# EAGLE board mrShark 01.a_nutzen (EAGLE 5.11)
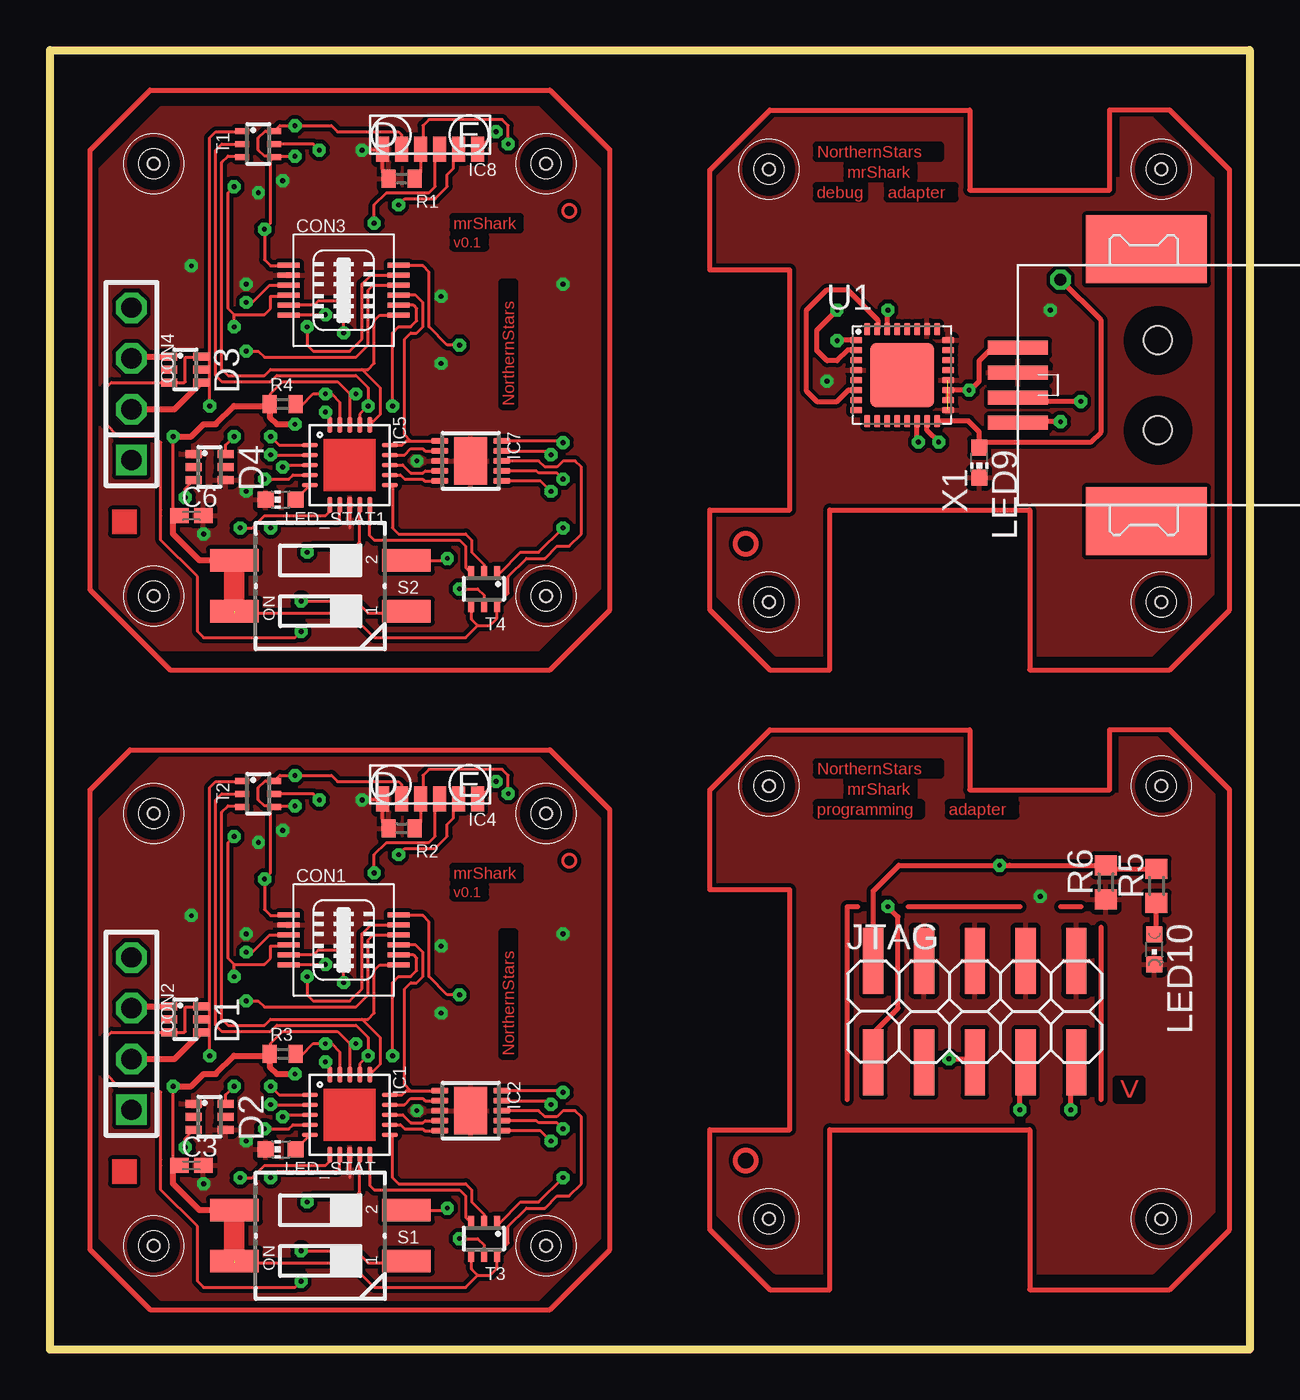
[diagram p0: board, top side]
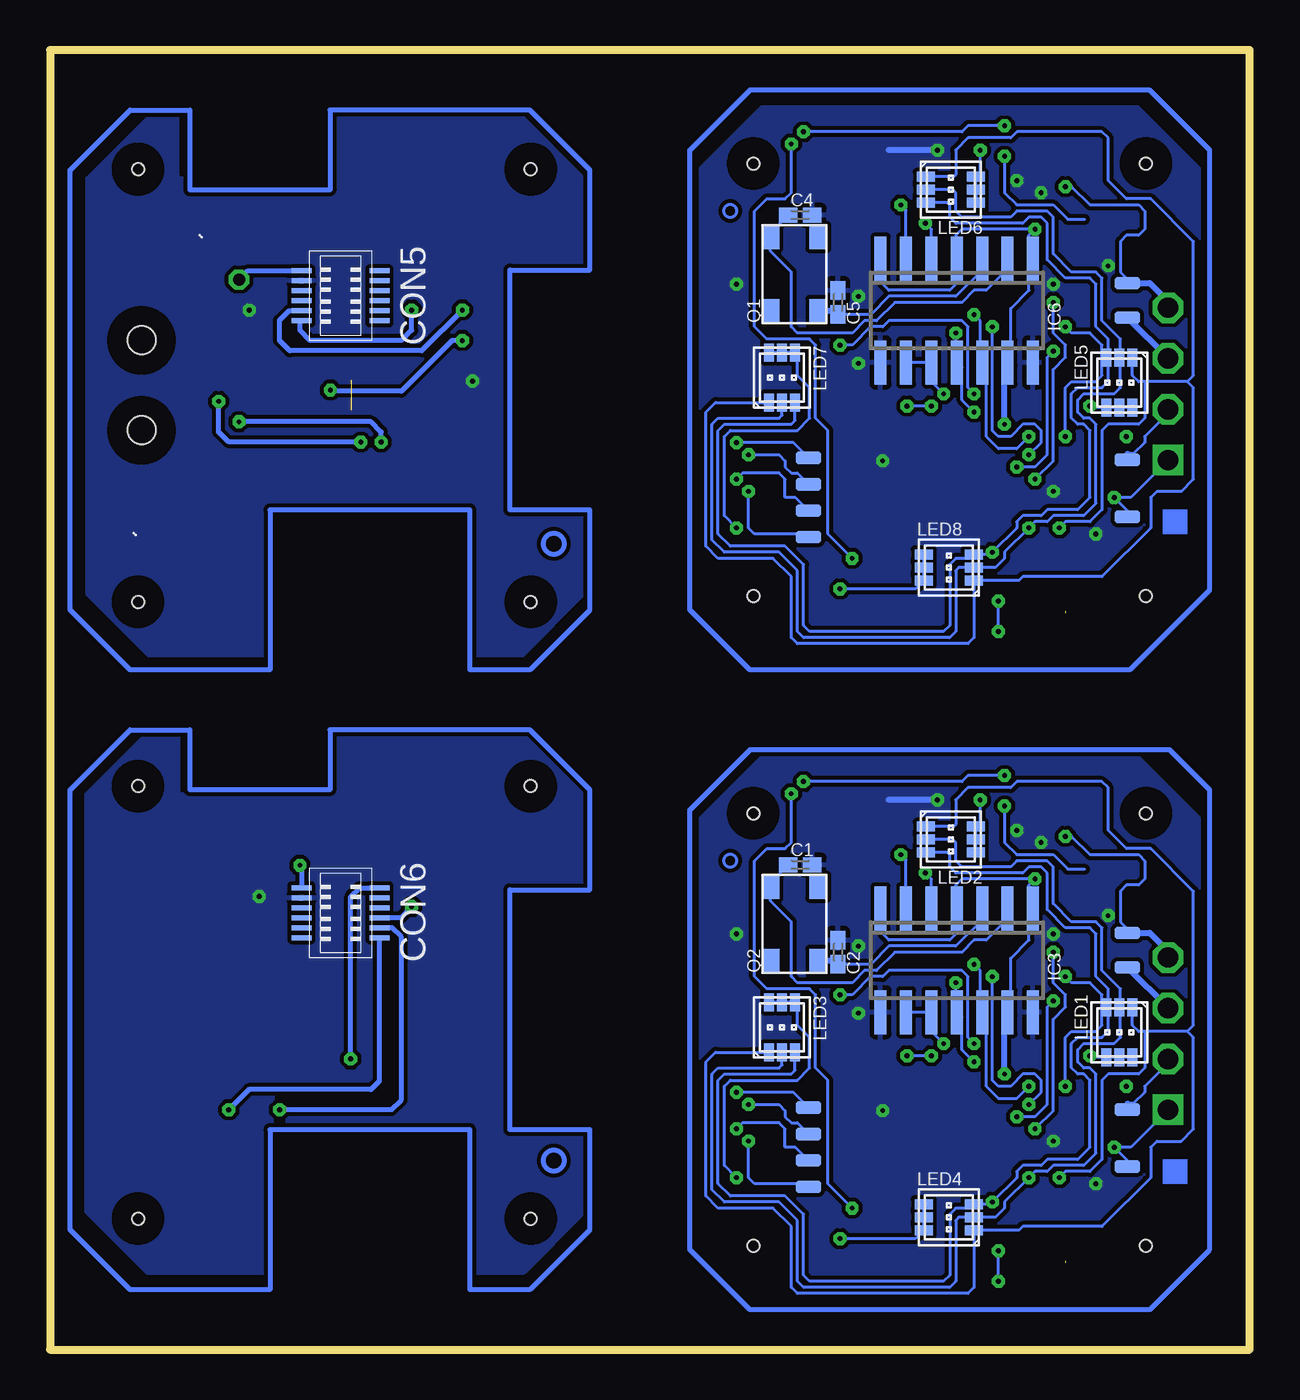
[diagram p1: board, bottom side, seen from below]

Size 60 x 65 mm. Coordinates in mm from the lower left corner, seen from the top.
Outline: 0,0 0,65 60,65 60,0 0,0
Copper layers (1*16): Top 0.035mm / dielectric 1.5mm / Bottom 0.035mm
Design rules "default": minimum track width 10mil, minimum drill 24mil, track to track 8mil, track to pad 8mil, pad to pad 8mil, via to via 8mil, smd to smd 8mil, copper to edge 40mil, drill to drill 8mil, minimum pad ring 10mil, minimum via ring 8mil, stop-mask expansion 4mil, vias tented up to drill 0mil, thermal gap 10mil

## Footprints (pad centres in the part's own frame; a part is rotated, then mirrored left to right if it is on the bottom)
SMD0,635-1,27 = smd 0.635 x 1.27: P$1 0,0
C0402K = smd 0.925 x 0.74: 1 -0.6,0; 2 0.6,0
DF23C-12DS = smd 0.25 x 1.1: 1 -1.25,-2.75; 2 -0.75,-2.75; 3 -0.25,-2.75; 4 0.25,-2.75; 5 0.75,-2.75; 6 1.25,-2.75; 7 1.25,2.75; 8 0.75,2.75; 9 0.25,2.75; 10 -0.25,2.75; 11 -0.75,2.75; 12 -1.25,2.75
1X04 = drill 1.016 square: 1 -3.81,0 | drill 1.016 octagon: 2 -1.27,0; 3 1.27,0; 4 3.81,0
DF23C-12-DP = smd 0.25 x 1: 1 -1.25,1.95; 2 -0.75,1.95; 3 -0.25,1.95; 4 0.25,1.95; 5 0.75,1.95; 6 1.25,1.95; 7 1.25,-1.95; 8 0.75,-1.95; 9 0.25,-1.95; 10 -0.25,-1.95; 11 -0.75,-1.95; 12 -1.25,-1.95
SOT363_PHILIPS = smd 0.4 x 0.8: 1 -0.65,-0.8; 2 0,-0.8; 3 0.65,-0.8; 4 0.65,0.8; 5 0,0.8; 6 -0.65,0.8
1,5 = hole 0.6: 0,0
MLF20 = smd 0.8 x 0.23: P$1 -2,1; P$2 -2,0.5; P$3 -2,0; P$4 -2,-0.5; P$5 -2,-1; P$11 2,-1; P$12 2,-0.5; P$13 2,0; P$14 2,0.5; P$15 2,1 | smd 0.23 x 0.8: P$6 -1,-2; P$7 -0.5,-2; P$8 0,-2; P$9 0.5,-2; P$10 1,-2; P$16 1,2; P$17 0.5,2; P$18 0,2; P$19 -0.5,2; P$20 -1,2
DFN10-3X3 = smd 0.3 x 0.85: 1 -1,-1.55; 2 -0.5,-1.55; 3 0,-1.55; 4 0.5,-1.55; 5 1,-1.55; 6 1,1.55; 7 0.5,1.55; 8 0,1.55; 9 -0.5,1.55; 10 -1,1.55 | smd 2.38 x 1.65: EXP 0,0
SO-14 = smd 0.6 x 2.2: 1 -3.81,-2.6; 2 -2.54,-2.6; 3 -1.27,-2.6; 4 0,-2.6; 5 1.27,-2.6; 6 2.54,-2.6; 7 3.81,-2.6; 8 3.81,2.6; 9 2.54,2.6; 10 1.27,2.6; 11 0,2.6; 12 -1.27,2.6; 13 -2.54,2.6; 14 -3.81,2.6
TFBS4711 = smd 0.635 x 1.27: 1 -2.38,0.72; 2 -1.43,0.72; 3 -0.48,0.72; 4 0.47,0.72; 5 1.42,0.72; 6 2.37,0.72
2X05SMD = smd 1.016 x 3.302: 1 -1.27,-3.81; 2 -1.27,1.27; 3 1.27,-3.81; 4 1.27,1.27; 5 3.81,-3.81; 6 3.81,1.27; 7 6.35,-3.81; 8 6.35,1.27; 9 8.89,-3.81; 10 8.89,1.27
PLCC6 = smd 0.9 x 0.5: 1 1.25,-0.65; 2 1.25,0; 3 1.25,0.65; 4 -1.25,0.65; 5 -1.25,0; 6 -1.25,-0.65
CHIP-LED0603 = smd 0.8 x 0.8: A 0,-0.75; C 0,0.75
CHIPLED_0603 = smd 0.8 x 0.8: A 0,-0.75; C 0,0.75
CFPX-104 = smd 1.2 x 0.9: P$1 -1.8,-1.2; P$2 1.9,1.2; P$3 -1.8,1.2; P$4 1.9,-1.2
R0402 = smd 0.7 x 0.9: 1 -0.65,0; 2 0.65,0
R0603 = smd 1 x 1.1: 1 -0.85,0; 2 0.85,0
CTS-219-02 = smd 1.13 x 2.44: 1 -1.27,-4.3; 2 1.27,-4.3; 3 1.27,4.3; 4 -1.27,4.3
SOT363_INFINEON = smd 0.3 x 0.7: 1 -0.65,-0.8; 2 0,-0.8; 3 0.65,-0.8; 4 0.65,0.8; 5 0,0.8; 6 -0.65,0.8
QFN32 = smd 0.6 x 0.3: 1 -2.3,1.75; 2 -2.3,1.25; 3 -2.3,0.75; 4 -2.3,0.25; 5 -2.3,-0.25; 6 -2.3,-0.75; 7 -2.3,-1.25; 8 -2.3,-1.75; 17 2.3,-1.75; 18 2.3,-1.25; 19 2.3,-0.75; 20 2.3,-0.25; 21 2.3,0.25; 22 2.3,0.75; 23 2.3,1.25; 24 2.3,1.75 | smd 0.3 x 0.6: 9 -1.75,-2.3; 10 -1.25,-2.3; 11 -0.75,-2.3; 12 -0.25,-2.3; 13 0.25,-2.3; 14 0.75,-2.3; 15 1.25,-2.3; 16 1.75,-2.3; 25 1.75,2.3; 26 1.25,2.3; 27 0.75,2.3; 28 0.25,2.3; 29 -0.25,2.3; 30 -0.75,2.3; 31 -1.25,2.3; 32 -1.75,2.3 | smd 3.2 x 3.2: EXP 0,0
USB-B-SMT = smd 6.04 x 3.4: 5 0.58,6.8; 6 0.58,-6.8 | smd 3 x 0.7: D+ 7,1.875; D- 7,0.625; GND 7,-0.625; VUSB 7,-1.875 | hole 1.4: 0,2.25; 0,-2.25

## Placement (x,y rotation side)
BAT1+  [SMD0,635-1,27]  6.11,19.11 90 bottom
BAT1+1  [SMD0,635-1,27]  6.11,51.61 90 bottom
BAT1-  [SMD0,635-1,27]  6.11,20.84 90 bottom
BAT1-1  [SMD0,635-1,27]  6.11,53.34 90 bottom
BAT2+  [SMD0,635-1,27]  6.11,12 90 bottom
BAT2+1  [SMD0,635-1,27]  6.11,44.5 90 bottom
BAT2-  [SMD0,635-1,27]  6.11,9.15 90 bottom
BAT2-1  [SMD0,635-1,27]  6.11,41.65 90 bottom
C1  18p  [C0402K]  22.46,24.24 0 bottom
C2  18p  [C0402K]  20.58,19.87 90 bottom
C3  100n  [C0402K]  7.07,9.21 0 top
C4  18p  [C0402K]  22.46,56.74 0 bottom
C5  18p  [C0402K]  20.58,52.37 90 bottom
C6  100n  [C0402K]  7.07,41.71 0 top
CON1  DF-23C-12DS-0.5V  [DF23C-12DS]  14.69,20.48 270 top
CON2  SQT-104-01-L-S  [1X04]  4.07,15.8 90 top
CON3  DF-23C-12DS-0.5V  [DF23C-12DS]  14.69,52.98 270 top
CON4  SQT-104-01-L-S  [1X04]  4.07,48.3 90 top
CON5  DF-23C-12DP-0.5V  [DF23C-12-DP]  45.47,52.7 270 bottom
CON6  DF-23C-12DP-0.5V  [DF23C-12-DP]  45.47,21.85 270 bottom
D1  BAS70-07S  [SOT363_PHILIPS]  6.77,16.52 270 top
D2  BAS70-07S  [SOT363_PHILIPS]  7.99,11.64 270 top
D3  BAS70-07S  [SOT363_PHILIPS]  6.77,49.02 270 top
D4  BAS70-07S  [SOT363_PHILIPS]  7.99,44.14 270 top
H1  MOUNT-HOLE1,5  [1,5]  5.18,5.18 0 top
H2  MOUNT-HOLE1,5  [1,5]  24.82,5.18 0 top
H3  MOUNT-HOLE1,5  [1,5]  24.82,26.82 0 top
H4  MOUNT-HOLE1,5  [1,5]  5.18,26.82 0 top
H5  MOUNT-HOLE1,5  [1,5]  5.18,37.68 0 top
H6  MOUNT-HOLE1,5  [1,5]  24.82,37.68 0 top
H7  MOUNT-HOLE1,5  [1,5]  24.82,59.32 0 top
H8  MOUNT-HOLE1,5  [1,5]  5.18,59.32 0 top
H9  MOUNT-HOLE1,5  [1,5]  35.96,37.4 0 top
H10  MOUNT-HOLE1,5  [1,5]  55.6,37.4 0 top
H11  MOUNT-HOLE1,5  [1,5]  55.6,59.04 0 top
H12  MOUNT-HOLE1,5  [1,5]  35.96,59.04 0 top
H13  MOUNT-HOLE1,5  [1,5]  35.96,6.54 0 top
H14  MOUNT-HOLE1,5  [1,5]  55.6,6.54 0 top
H15  MOUNT-HOLE1,5  [1,5]  55.6,28.18 0 top
H16  MOUNT-HOLE1,5  [1,5]  35.96,28.18 0 top
IC1  TINY4313MU  [MLF20]  15,11.75 0 top
IC2  A3901  [DFN10-3X3]  21.04,11.95 270 top
IC3  MCP2120-I/SL  [SO-14]  14.64,19.47 180 bottom
IC4  TFBS4711-TR1  [TFBS4711]  19.01,28.26 180 top
IC5  TINY4313MU  [MLF20]  15,44.25 0 top
IC6  MCP2120-I/SL  [SO-14]  14.64,51.97 180 bottom
IC7  A3901  [DFN10-3X3]  21.04,44.45 270 top
IC8  TFBS4711-TR1  [TFBS4711]  19.01,60.76 180 top
JTAG  [2X05SMD]  42.45,18.17 0 top
LED1  ASMT-YTD2-0BB02  [PLCC6]  6.51,15.86 90 bottom
LED2  ASMT-YTD2-0BB02  [PLCC6]  14.95,25.51 180 bottom
LED3  ASMT-YTD2-0BB02  [PLCC6]  23.38,16.11 270 bottom
LED4  ASMT-YTD2-0BB02  [PLCC6]  15.05,6.61 0 bottom
LED5  ASMT-YTD2-0BB02  [PLCC6]  6.51,48.36 90 bottom
LED6  ASMT-YTD2-0BB02  [PLCC6]  14.95,58.01 180 bottom
LED7  ASMT-YTD2-0BB02  [PLCC6]  23.38,48.61 270 bottom
LED8  ASMT-YTD2-0BB02  [PLCC6]  15.05,39.11 0 bottom
LED9  rot  [CHIP-LED0603]  46.48,44.37 180 top
LED10  rot  [CHIPLED_0603]  55.25,20.02 180 top
LED_STAT  green  [CHIP-LED0603]  11.54,10.02 90 top
LED_STAT1  green  [CHIP-LED0603]  11.54,42.52 90 top
MOTOR_L+  [SMD0,635-1,27]  22.06,12.1 90 bottom
MOTOR_L+1  [SMD0,635-1,27]  22.06,44.6 90 bottom
MOTOR_L-  [SMD0,635-1,27]  22.06,10.78 90 bottom
MOTOR_L-1  [SMD0,635-1,27]  22.06,43.28 90 bottom
MOTOR_R+  [SMD0,635-1,27]  22.06,9.46 90 bottom
MOTOR_R+1  [SMD0,635-1,27]  22.06,41.96 90 bottom
MOTOR_R-  [SMD0,635-1,27]  22.06,8.14 90 bottom
MOTOR_R-1  [SMD0,635-1,27]  22.06,40.64 90 bottom
Q1  14.7456MHz  [CFPX-104]  22.77,53.75 90 bottom
Q2  14.7456MHz  [CFPX-104]  22.77,21.25 90 bottom
R1  1k  [R0402]  17.59,58.57 0 top
R2  1k  [R0402]  17.59,26.07 0 top
R3  1k  [R0402]  11.64,14.79 0 top
R4  1k  [R0402]  11.64,47.29 0 top
R5  100R  [R0603]  55.35,23.19 90 top
R6  1k  [R0603]  52.81,23.37 90 top
S1  MCEMR-02-T  [CTS-219-02]  13.52,5.7 90 top
S2  MCEMR-02-T  [CTS-219-02]  13.52,38.2 90 top
T1  UMX3NTR  [SOT363_INFINEON]  10.42,60.3 270 top
T2  UMX3NTR  [SOT363_INFINEON]  10.42,27.8 270 top
T3  UMX3NTR  [SOT363_INFINEON]  21.7,5.55 180 top
T4  UMX3NTR  [SOT363_INFINEON]  21.7,38.05 180 top
U1  [QFN32]  42.62,48.74 0 top
X1  [USB-B-SMT]  55.42,48.23 180 top

## Library data of the parts
BAT1+ BAT1+1 BAT1- BAT1-1 BAT2+ BAT2+1 BAT2- BAT2-1 MOTOR_L+ MOTOR_L+1 MOTOR_L- MOTOR_L-1 MOTOR_R+ MOTOR_R+1 MOTOR_R- MOTOR_R-1 = wirepad
C1-C6 R1-R6 = rcl
CON1 CON3 CON5 CON6 = con-hirose
CON2 CON4 = pinhead-2mm
D1-D4 = diode
H1-H16 = holes
IC1 IC5 = avr-6
IC2 IC7 = allegro
IC3 IC6 = microchip
IC4 IC8 = vishay
JTAG = pinhead-2
LED1-LED10 LED_STAT LED_STAT1 = led
Q1 Q2 = crystal
S1 S2 = switch-dil
T1-T4 = transistor-small-signal
U1 = ftdichip
X1 = con-usb-3

## Nets
+3V3: CON5.12 LED9.A U1.16
BAT1+: BAT1+.P$1 CON2.3 D1.1
BAT1+1: BAT1+1.P$1 CON4.3 D3.1
BAT1-: BAT1-.P$1 CON2.4 D2.6
BAT1-1: BAT1-1.P$1 CON4.4 D4.6
BAT2+: BAT2+.P$1 CON2.2 D1.4
BAT2+1: BAT2+1.P$1 CON4.2 D3.4
BAT2-: BAT2-.P$1 CON2.1 D2.3
BAT2-1: BAT2-1.P$1 CON4.1 D4.3
GND2: C1.2 C2.2 C3.2 CON1.2 D2.1 D2.4 IC1.P$8 IC2.3 IC2.EXP IC3.8 IC3.14 IC4.6 LED_STAT.C R2.1
GND3: C4.2 C5.2 C6.2 CON3.2 D4.1 D4.4 IC5.P$8 IC6.8 IC6.14 IC7.3 IC7.EXP IC8.6 LED_STAT1.C R1.1
GND5: CON6.11 JTAG.4 JTAG.6 JTAG.8 JTAG.10 LED10.C R6.1
GND6: CON5.11 LED9.C U1.4 U1.17 U1.20 U1.24 U1.26 X1.GND
INT0: CON1.3 IC1.P$4
INT1: CON1.4
INT2: CON3.3 IC5.P$4
INT3: CON3.4
INT4: CON6.10
INT5: CON6.9
LED1: IC5.P$11 T4.2
LED1+: LED1.4 LED1.5 LED1.6 T2.1
LED1+1: LED5.4 LED5.5 LED5.6 T1.1
LED2: IC5.P$10 T4.3
LED2+: LED2.4 LED2.5 LED2.6 T2.5
LED2+1: LED6.4 LED6.5 LED6.6 T1.5
LED3: IC1.P$11 T3.2
LED3+: LED3.4 LED3.5 LED3.6 T3.1
LED3+1: LED7.4 LED7.5 LED7.6 T4.1
LED4: IC1.P$10 T3.3
LED4+: LED4.4 LED4.5 LED4.6 T3.5
LED4+1: LED8.4 LED8.5 LED8.6 T4.5
LED_B: IC1.P$6 LED1.1 LED2.1 LED3.1 LED4.1
LED_B1: IC5.P$6 LED5.1 LED6.1 LED7.1 LED8.1
LED_G: IC1.P$7 LED1.2 LED2.2 LED3.2 LED4.2
LED_G1: IC5.P$7 LED5.2 LED6.2 LED7.2 LED8.2
LED_R: IC1.P$9 LED1.3 LED2.3 LED3.3 LED4.3
LED_R1: IC5.P$9 LED5.3 LED6.3 LED7.3 LED8.3
LED_STAT: IC1.P$5 LED_STAT.A
LED_STAT1: IC5.P$5 LED_STAT1.A
MISO: CON6.6 JTAG.9
MISO/LED1: CON3.7 IC5.P$16 T1.3
MISO/LED2: CON1.7 IC1.P$16 T2.3
MOSI: CON6.4 JTAG.1
MOSI/MOTOR_L_DIR: CON1.9 IC1.P$15 IC2.1
MOSI/MOTOR_L_DIR1: CON3.9 IC5.P$15 IC7.1
MOTOR_L+: IC2.10 MOTOR_L+.P$1
MOTOR_L+1: IC7.10 MOTOR_L+1.P$1
MOTOR_L-: IC2.9 MOTOR_L-.P$1
MOTOR_L-1: IC7.9 MOTOR_L-1.P$1
MOTOR_L_PWM: IC1.P$14 IC2.2
MOTOR_L_PWM1: IC5.P$14 IC7.2
MOTOR_R+: IC2.7 MOTOR_R+.P$1
MOTOR_R+1: IC7.7 MOTOR_R+1.P$1
MOTOR_R-: IC2.6 MOTOR_R-.P$1
MOTOR_R-1: IC7.6 MOTOR_R-1.P$1
MOTOR_R_DIR: IC1.P$12 IC2.5
MOTOR_R_DIR1: IC5.P$12 IC7.5
MOTOR_R_PWM: IC1.P$13 IC2.4
MOTOR_R_PWM1: IC5.P$13 IC7.4
N$1: C2.1 IC3.3 Q2.P$1
N$2: C1.1 IC3.2 Q2.P$2
N$3: C5.1 IC6.3 Q1.P$1
N$4: C4.1 IC6.2 Q1.P$2
N$5: U1.6 U1.31
N$6: U1.15 X1.D-
N$7: U1.14 X1.D+
N$8: LED10.A R5.1
PA0: CON1.10 IC1.P$3
PA1: CON1.11 IC1.P$2
PA2: CON3.10 IC5.P$3
PA3: CON3.11 IC5.P$2
PA4: CON6.3
PA5: CON6.2
RESET: CON1.12 IC1.P$19 R3.2
RESET1: CON3.12 IC5.P$19 R4.2
RESET2: CON6.1 JTAG.5
RXD: CON1.5 IC1.P$20 IC3.11
RXD1: CON3.5 IC5.P$20 IC6.11
RXD2: CON5.8 U1.2
RXD3: CON6.8
RXIR: IC3.5 IC4.3
RXIR1: IC6.5 IC8.3
SCK: CON6.5 JTAG.7
SCK/LED1: CON1.8 IC1.P$17 T2.2
SCK/LED2: CON3.8 IC5.P$17 T1.2
T_IR: IC4.4 R2.2 S1.2
T_IR1: IC8.4 R1.2 S2.2
TXD: CON1.6 IC1.P$1 IC3.12
TXD1: CON3.6 IC5.P$1 IC6.12
TXD2: CON5.7 U1.30
TXD3: CON6.7
TXIR: IC3.6 IC4.2
TXIR1: IC6.6 IC8.2
VBAT: D1.3 D1.6 S1.1
VBAT1: D3.3 D3.6 S2.1
VCC: C3.1 CON1.1 IC1.P$18 IC2.8 IC3.1 IC3.4 IC3.7 IC3.9 IC3.10 IC3.13 IC4.1 IC4.5 R3.1 S1.3 S1.4 T2.4 T2.6 T3.4 T3.6
VCC1: C6.1 CON3.1 IC5.P$18 IC6.1 IC6.4 IC6.7 IC6.9 IC6.10 IC6.13 IC7.8 IC8.1 IC8.5 R4.1 S2.3 S2.4 T1.4 T1.6 T4.4 T4.6
VCC2: U1.1 U1.18 U1.19 X1.VUSB
VCC3: CON6.12 JTAG.2 R5.2 R6.2

## Tracks (layer width: path | path; a pad name or v marks a point on that pad's centre or on a via)
+3V3  (via drill 0.6 pad 0.41)
  Top 0.254: U1.16 45.94,46.44 46.48,45.9 46.48,45.39 | 46.48,45.39 52.07,45.39 52.58,45.9 52.58,51.48 v50.55,53.52 | LED9.A 46.48,45.39
  Bottom 0.254: CON5.12 50.11,53.95 v50.55,53.52
BAT1+
  Top 0.305: D1.1 4.17,17.17 CON2.3
  Bottom 0.305: CON2.3 BAT1+.P$1
BAT1+1
  Top 0.305: D3.1 4.17,49.67 CON4.3
  Bottom 0.305: CON4.3 BAT1+1.P$1
BAT1-  (via drill 0.24, 0.24 pad 0.41)
  Top 0.152: v9.21,25.66 8.9,25.36 8.9,19.57 9.21,19.26 | 9.21,19.26 10.73,19.26 11.03,19.57 11.03,20.18 11.89,20.18 | D2.6 8.79,12.75 v9.21,13.17 | v9.21,18.65 9.21,19.26
  Bottom 0.152: BAT1-.P$1 6.11,21.04 6.46,21.4 6.46,22.92 6.16,23.23 5.55,23.23 5.24,23.53 5.24,24.45 5.55,24.75 7.99,24.75 8.9,25.66 v9.21,25.66 | v9.21,13.17 9.21,15.61 8.9,15.91 7.68,15.91 7.38,16.22 7.38,17.74 7.99,18.35 8.9,18.35 v9.21,18.65
  Bottom 0.305: CON2.4 4.07,19.92 4.99,20.84 BAT1-.P$1
BAT1-1  (via drill 0.24, 0.24 pad 0.41)
  Top 0.152: v9.21,58.16 8.9,57.86 8.9,52.07 9.21,51.76 | 9.21,51.76 10.73,51.76 11.03,52.07 11.03,52.68 11.89,52.68 | D4.6 8.79,45.25 v9.21,45.67 | v9.21,51.15 9.21,51.76
  Bottom 0.152: BAT1-1.P$1 6.11,53.54 6.46,53.9 6.46,55.42 6.16,55.73 5.55,55.73 5.24,56.03 5.24,56.95 5.55,57.25 7.99,57.25 8.9,58.16 v9.21,58.16 | v9.21,45.67 9.21,48.11 8.9,48.41 7.68,48.41 7.38,48.72 7.38,50.24 7.99,50.85 8.9,50.85 v9.21,51.15
  Bottom 0.305: CON4.4 4.07,52.42 4.99,53.34 BAT1-1.P$1
BAT2+
  Top 0.305: CON2.2 6.23,14.53 D1.4
  Bottom 0.152: 6.11,12.3 5.8,12.3 5.24,12.86 5.24,13.17 4.07,14.34 CON2.2
  Bottom 0.305: 6.11,12.3 BAT2+.P$1
BAT2+1
  Top 0.305: CON4.2 6.23,47.03 D3.4
  Bottom 0.152: 6.11,44.8 5.8,44.8 5.24,45.36 5.24,45.67 4.07,46.84 CON4.2
  Bottom 0.305: 6.11,44.8 BAT2+1.P$1
BAT2-  (via drill 0.24 pad 0.41)
  Top 0.152: D2.3 6.77,10.57 v6.77,10.12
  Bottom 0.152: BAT2-.P$1 6.11,9.46 v6.77,10.12 5.94,10.12 CON2.1
BAT2-1  (via drill 0.24 pad 0.41)
  Top 0.152: D4.3 6.77,43.08 v6.77,42.62
  Bottom 0.152: BAT2-1.P$1 6.11,41.96 v6.77,42.62 5.94,42.62 CON4.1
GND2  (via drill 0.24, 0.24 pad 0.41)
  Top 0.152: R2.1 16.64,26.37 IC4.6 16.6,27.49 v15.61,27.49 | IC1.P$8 15,8.6
  Bottom 0.305: v15.61,27.49 18.05,27.49
  other vias: 18.35,11.95 7.68,8.29 9.82,10.42 19.57,16.83 19.57,20.18 11.64,25.97 10.42,25.36 9.82,20.79 7.07,21.7 25.66,20.79
  pour Top: 2.5,5.55 2.5,26.58 5.55,29.63 24.45,29.63 27.49,26.58 27.49,5.55 24.45,2.5 5.55,2.5
  pour Bottom: 2.5,5.55 2.5,26.58 5.55,29.63 24.45,29.63 27.49,26.58 27.49,5.55 24.45,2.5 5.55,2.5
GND3  (via drill 0.24, 0.24 pad 0.41)
  Top 0.152: R1.1 16.64,58.87 IC8.6 16.6,59.99 v15.61,59.99 | IC5.P$8 15,41.1
  Bottom 0.305: v15.61,59.99 18.05,59.99
  other vias: 18.35,44.45 7.68,40.79 9.82,42.92 19.57,49.33 19.57,52.68 11.64,58.47 10.42,57.86 9.82,53.29 7.07,54.2 25.66,53.29
  pour Top: 2.5,38.05 2.5,59.08 5.55,62.13 24.45,62.13 27.49,59.08 27.49,38.05 24.45,35 5.55,35
  pour Bottom: 2.5,38.05 2.5,59.08 5.55,62.13 24.45,62.13 27.49,59.08 27.49,38.05 24.45,35 5.55,35
GND5  (via drill 0.24 pad 0.41)
  other vias: 49.53,22.66
  pour Bottom (rank 2): 37.34,10.98 37.34,22.66 33.28,22.66 33.28,27.74 36.32,30.79 46.48,30.79 46.48,27.74 53.6,27.74 53.6,30.79 55.12,30.79 58.17,27.74 58.17,6.91 55.12,3.86 49.02,3.86 49.02,10.47 49.02,10.98 39.37,10.98 39.37,3.86 36.32,3.86 33.28,6.91 33.28,10.98
  pour Top (rank 2): 37.34,10.98 37.34,22.66 33.28,22.66 33.28,27.74 36.32,30.79 46.48,30.79 46.48,27.74 53.6,27.74 53.6,30.79 55.12,30.79 58.17,27.74 58.17,6.91 55.12,3.86 49.02,3.86 49.02,10.98 39.37,10.98 39.37,3.86 36.32,3.86 33.28,6.91 33.28,10.98
GND6  (via drill 0.24 pad 0.41)  (1 unrouted)
  other vias: 50.04,51.99 38.86,48.44
  pour Bottom: 37.34,41.83 37.34,53.52 33.28,53.52 33.28,58.6 36.32,61.64 46.48,61.64 46.48,58.6 53.6,58.6 53.6,61.64 55.12,61.64 58.17,58.6 58.17,37.77 55.12,34.72 49.02,34.72 49.02,41.83 39.37,41.83 39.37,34.72 36.32,34.72 33.28,37.77 33.28,41.83
  pour Top: 37.34,41.83 37.34,53.52 33.28,53.52 33.28,58.6 36.32,61.64 46.48,61.64 46.48,58.6 53.6,58.6 53.6,61.64 55.12,61.64 58.17,58.6 58.17,37.77 55.12,34.72 49.02,34.72 49.02,41.32 49.02,41.83 39.37,41.83 39.37,34.72 36.32,34.72 33.28,37.77 33.28,41.83
INT0  (via drill 0.24, 0.24 pad 0.41)
  Top 0.152: IC1.P$4 12.16,11.25 11.95,11.03 v10.73,11.03 | CON1.3 10.98,20.73 10.12,19.87 v9.81,19.87
  Bottom 0.152: v10.73,11.03 9.81,11.95 9.81,16.52 9.21,17.13 9.21,17.74 9.81,18.35 v9.81,19.87
INT2  (via drill 0.24, 0.24 pad 0.41)
  Top 0.152: IC5.P$4 12.16,43.75 11.95,43.53 v10.73,43.53 | CON3.3 10.98,53.23 10.12,52.37 v9.81,52.37
  Bottom 0.152: v10.73,43.53 9.81,44.45 9.81,49.02 9.21,49.63 9.21,50.24 9.81,50.85 v9.81,52.37
LED1
  Top 0.152: T4.2 21.7,39.27 21.09,39.88 21.09,40.49 20.79,40.79 17.43,40.79 17.13,41.1 17.13,43.11 IC5.P$11
LED1+  (via drill 0.24 pad 0.41)
  Top 0.152: T2.1 9.58,28.41 8.29,28.41 7.99,28.1 v7.99,14.69
  Bottom 0.152: LED1.6 LED1.5 LED1.4 7.91,14.61 v7.99,14.69
LED1+1  (via drill 0.24 pad 0.41)
  Top 0.152: T1.1 9.58,60.91 8.29,60.91 7.99,60.6 v7.99,47.19
  Bottom 0.152: LED5.6 LED5.5 LED5.4 7.91,47.11 v7.99,47.19
LED2
  Top 0.152: IC5.P$10 16,40.71 16.22,40.49 20.48,40.49 20.79,40.18 20.79,39.11 T4.3
LED2+  (via drill 0.24 pad 0.41)
  Top 0.152: T2.5 13.17,27.8 v13.47,27.49
  Bottom 0.152: LED2.4 LED2.5 LED2.6 13.47,26.39 v13.47,27.49
LED2+1  (via drill 0.24 pad 0.41)
  Top 0.152: T1.5 13.17,60.3 v13.47,59.99
  Bottom 0.152: LED6.4 LED6.5 LED6.6 13.47,58.89 v13.47,59.99
LED3
  Top 0.152: T3.2 21.7,6.77 21.09,7.38 21.09,7.99 20.79,8.29 17.43,8.29 17.13,8.6 17.13,10.61 IC1.P$11
LED3+  (via drill 0.24 pad 0.41)
  Top 0.152: T3.1 22.5,6.35 23.53,7.38 24.45,7.38 v25.66,8.6
  Bottom 0.152: LED3.6 LED3.5 LED3.4 22.62,17.25 22.62,16.22 22.01,15.61 22.01,14.08 22.62,13.47 25.97,13.47 26.27,13.17 26.27,9.21 v25.66,8.6
LED3+1  (via drill 0.24 pad 0.41)
  Top 0.152: T4.1 22.5,38.85 23.53,39.88 24.45,39.88 v25.66,41.1
  Bottom 0.152: LED7.6 LED7.5 LED7.4 22.62,49.75 22.62,48.72 22.01,48.11 22.01,46.58 22.62,45.97 25.97,45.97 26.27,45.67 26.27,41.71 v25.66,41.1
LED4
  Top 0.152: IC1.P$10 16,8.21 16.22,7.99 20.48,7.99 20.79,7.68 20.79,6.61 T3.3
LED4+  (via drill 0.24 pad 0.41)
  Top 0.152: T3.5 21.7,5.24 21.4,5.55 v20.48,5.55
  Bottom 0.152: LED4.4 LED4.5 LED4.6 16.71,5.55 v20.48,5.55
LED4+1  (via drill 0.24 pad 0.41)
  Top 0.152: T4.5 21.7,37.74 21.4,38.05 v20.48,38.05
  Bottom 0.152: LED8.4 LED8.5 LED8.6 16.71,38.05 v20.48,38.05
LED_B  (via drill 0.24 pad 0.41)
  Top 0.152: IC1.P$6 14,9.43 13.78,9.21 10.73,9.21 10.12,8.6 v9.51,8.6
  Bottom 0.152: LED2.1 14.8,26.16 14.69,26.27 14.69,27.49 14.08,28.1 11.95,28.1 11.64,28.41 7.38,28.41 7.07,28.1 7.07,25.97 6.16,25.05 4.94,25.05 2.81,22.92 2.81,16.22 3.11,15.91 | LED1.1 5.86,16.22 5.55,15.91 5.24,15.91 | 3.11,15.91 5.24,15.91 | 3.11,15.91 2.81,15.61 2.81,11.03 3.41,10.43 4.63,10.43 4.94,10.12 4.94,8.6 7.38,6.16 11.34,6.16 11.53,5.96 LED4.1 13.78,5.95 13.78,3.11 14.08,2.81 22.62,2.81 22.92,3.11 22.92,6.16 23.84,7.07 26.58,7.07 27.19,7.68 27.19,14.39 26.71,14.86 LED3.1 | 5.24,15.91 5.24,14.08 5.55,13.78 7.07,13.78 7.38,13.47 7.38,9.51 7.99,8.9 9.21,8.9 v9.51,8.6
LED_B1  (via drill 0.24 pad 0.41)
  Top 0.152: IC5.P$6 14,41.92 13.78,41.71 10.73,41.71 10.12,41.1 v9.51,41.1
  Bottom 0.152: LED6.1 14.8,58.66 14.69,58.77 14.69,59.99 14.08,60.6 11.95,60.6 11.64,60.91 7.38,60.91 7.07,60.6 7.07,58.47 6.16,57.55 4.94,57.55 2.81,55.42 2.81,48.72 3.11,48.41 | LED5.1 5.86,48.72 5.55,48.41 5.24,48.41 | 3.11,48.41 5.24,48.41 | 3.11,48.41 2.81,48.11 2.81,43.53 3.41,42.92 4.63,42.92 4.94,42.62 4.94,41.1 7.38,38.66 11.34,38.66 11.53,38.47 LED8.1 13.78,38.45 13.78,35.61 14.08,35.3 22.62,35.3 22.92,35.61 22.92,38.66 23.84,39.57 26.58,39.57 27.19,40.18 27.19,46.89 26.71,47.36 LED7.1 | 5.24,48.41 5.24,46.58 5.55,46.28 7.07,46.28 7.38,45.97 7.38,42.01 7.99,41.4 9.21,41.4 v9.51,41.1
LED_G  (via drill 0.24 pad 0.41)
  Top 0.152: IC1.P$7 14.5,9.01 14.39,8.9 11.34,8.9 v11.03,8.6
  Bottom 0.152: LED2.2 14.84,25.51 14.69,25.36 14.69,24.45 14.39,24.14 11.95,24.14 11.64,24.45 10.12,24.45 9.81,24.14 9.81,22.31 8.9,21.4 7.68,21.4 7.38,21.09 7.38,18.96 6.46,18.05 6.46,17.15 LED1.2 6.46,17.07 6.46,15.61 6.77,15.3 8.29,15.3 8.6,15 8.6,14.39 8.29,14.08 7.99,14.08 7.68,13.78 7.68,9.81 8.29,9.21 9.81,9.21 10.12,8.9 10.73,8.9 v11.03,8.6 12.25,7.38 12.25,7.07 12.71,6.62 LED4.2 14.54,6.62 14.69,6.46 14.69,3.41 15,3.11 22.31,3.11 22.62,3.41 22.62,6.46 23.53,7.38 26.27,7.38 26.88,7.99 26.88,13.78 26.58,14.08 23.53,14.08 23.38,14.23 LED3.2
LED_G1  (via drill 0.24 pad 0.41)
  Top 0.152: IC5.P$7 14.5,41.51 14.39,41.4 11.34,41.4 v11.03,41.1
  Bottom 0.152: LED6.2 14.84,58.01 14.69,57.86 14.69,56.95 14.39,56.64 11.95,56.64 11.64,56.95 10.12,56.95 9.81,56.64 9.81,54.81 8.9,53.9 7.68,53.9 7.38,53.59 7.38,51.46 6.46,50.55 6.46,49.65 LED5.2 6.46,49.57 6.46,48.11 6.77,47.8 8.29,47.8 8.6,47.5 8.6,46.89 8.29,46.58 7.99,46.58 7.68,46.28 7.68,42.31 8.29,41.71 9.81,41.71 10.12,41.4 10.73,41.4 v11.03,41.1 12.25,39.88 12.25,39.57 12.71,39.12 LED8.2 14.54,39.12 14.69,38.96 14.69,35.91 15,35.61 22.31,35.61 22.62,35.91 22.62,38.96 23.53,39.88 26.27,39.88 26.88,40.49 26.88,46.28 26.58,46.58 23.53,46.58 23.38,46.73 LED7.2
LED_R  (via drill 0.24 pad 0.41)
  Top 0.152: IC1.P$9 15.5,7.88 15.3,7.68 13.17,7.68 v12.86,7.38
  Bottom 0.152: LED2.3 15.11,24.86 15,24.75 15,24.14 14.69,23.84 11.34,23.84 11.03,24.14 10.43,24.14 10.12,23.84 10.12,22.01 9.21,21.09 7.99,21.09 7.68,20.79 7.68,18.65 7.07,18.05 7.07,17.19 LED1.3 7.07,17.03 7.07,15.91 7.38,15.61 8.6,15.61 8.9,15.3 8.9,14.08 8.6,13.78 8.29,13.78 7.99,13.47 7.99,10.12 8.6,9.51 10.12,9.51 10.43,9.21 11.34,9.21 11.64,8.9 11.64,8.6 v12.86,7.38 12.97,7.26 LED4.3 13.99,7.07 14.69,7.07 15,6.77 15,3.72 15.3,3.41 22.01,3.41 22.31,3.72 22.31,6.77 23.23,7.68 25.97,7.68 26.58,8.29 26.58,13.47 26.27,13.78 22.92,13.78 22.73,13.97 LED3.3
LED_R1  (via drill 0.24 pad 0.41)
  Top 0.152: IC5.P$9 15.5,40.38 15.3,40.18 13.17,40.18 v12.86,39.88
  Bottom 0.152: LED6.3 15.11,57.36 15,57.25 15,56.64 14.69,56.34 11.34,56.34 11.03,56.64 10.43,56.64 10.12,56.34 10.12,54.51 9.21,53.59 7.99,53.59 7.68,53.29 7.68,51.15 7.07,50.55 7.07,49.69 LED5.3 7.07,49.53 7.07,48.41 7.38,48.11 8.6,48.11 8.9,47.8 8.9,46.58 8.6,46.28 8.29,46.28 7.99,45.97 7.99,42.62 8.6,42.01 10.12,42.01 10.43,41.71 11.34,41.71 11.64,41.4 11.64,41.1 v12.86,39.88 12.97,39.77 LED8.3 13.99,39.57 14.69,39.57 15,39.27 15,36.22 15.3,35.91 22.01,35.91 22.31,36.22 22.31,39.27 23.23,40.18 25.97,40.18 26.58,40.79 26.58,45.97 26.27,46.28 22.92,46.28 22.73,46.47 LED7.3
LED_STAT
  Top 0.152: IC1.P$5 13,10.72 LED_STAT.A
LED_STAT1
  Top 0.152: IC5.P$5 13,43.22 LED_STAT1.A
MISO  (via drill 0.24 pad 0.41)
  Top 0.254: v51.06,11.99 51.06,14.08 JTAG.9
  Bottom 0.254: CON6.6 43.52,13.43 43.94,13.01 50.04,13.01 v51.06,11.99
MISO/LED1
  Top 0.152: 16,46.36 IC5.P$16 16.52,46.77 16.52,48.11 15.61,49.02 | T1.3 9.58,59.69 8.9,59.69 8.6,59.38 8.6,49.02 8.9,48.72 10.73,48.72 11.03,49.02 15.61,49.02 | CON3.7 16.49,51.73 16.22,51.46 16.22,49.33 15.91,49.02 15.61,49.02
MISO/LED2
  Top 0.152: 16,13.86 IC1.P$16 16.52,14.27 16.52,15.61 15.61,16.52 | T2.3 9.58,27.19 8.9,27.19 8.6,26.88 8.6,16.52 8.9,16.22 10.73,16.22 11.03,16.52 15.61,16.52 | CON1.7 16.49,19.23 16.22,18.96 16.22,16.83 15.91,16.52 15.61,16.52
MOSI  (via drill 0.24 pad 0.41)
  Top 0.254: JTAG.1 41.18,15.83 42.42,17.07 42.42,21.64 v41.91,22.15
  Bottom 0.254: CON6.4 42.47,21.6 v41.91,22.15
MOSI/MOTOR_L_DIR
  Top 0.152: IC1.P$15 17.62,12.75 17.83,12.95 18.05,12.95 | 18.05,12.95 IC2.1 | CON1.9 18.3,20.23 18.65,19.87 18.65,18.65 18.35,18.35 18.05,18.35 17.74,18.05 17.74,13.25 18.05,12.95
MOSI/MOTOR_L_DIR1
  Top 0.152: IC5.P$15 17.62,45.25 17.83,45.45 18.05,45.45 | 18.05,45.45 IC7.1 | CON3.9 18.3,52.73 18.65,52.37 18.65,51.15 18.35,50.85 18.05,50.85 17.74,50.55 17.74,45.75 18.05,45.45
MOTOR_L+  (via drill 0.24 pad 0.41)
  Top 0.152: IC2.10 25.58,12.95 v25.66,12.86
  Bottom 0.152: v25.66,12.86 22.82,12.86 MOTOR_L+.P$1
MOTOR_L+1  (via drill 0.24 pad 0.41)
  Top 0.152: IC7.10 25.58,45.45 v25.66,45.36
  Bottom 0.152: v25.66,45.36 22.82,45.36 MOTOR_L+1.P$1
MOTOR_L-  (via drill 0.24 pad 0.41)
  Top 0.152: IC2.9 24.86,12.45 v25.05,12.25
  Bottom 0.152: v25.05,12.25 23.53,12.25 23.23,11.95 23.23,11.64 22.92,11.34 22.62,11.34 MOTOR_L-.P$1
MOTOR_L-1  (via drill 0.24 pad 0.41)
  Top 0.152: IC7.9 24.86,44.95 v25.05,44.75
  Bottom 0.152: v25.05,44.75 23.53,44.75 23.23,44.45 23.23,44.14 22.92,43.84 22.62,43.84 MOTOR_L-1.P$1
MOTOR_L_PWM
  Top 0.152: IC1.P$14 17.73,12.25 18.05,12.56 18.65,12.56 18.76,12.45 IC2.2
MOTOR_L_PWM1
  Top 0.152: IC5.P$14 17.73,44.75 18.05,45.06 18.65,45.06 18.76,44.95 IC7.2
MOTOR_R+  (via drill 0.24 pad 0.41)
  Top 0.152: IC2.7 24.34,11.45 24.45,11.34 25.36,11.34 v25.66,11.03
  Bottom 0.152: v25.66,11.03 25.36,11.34 23.53,11.34 23.23,11.03 23.23,10.12 22.72,10.12 MOTOR_R+.P$1
MOTOR_R+1  (via drill 0.24 pad 0.41)
  Top 0.152: IC7.7 24.34,43.95 24.45,43.84 25.36,43.84 v25.66,43.53
  Bottom 0.152: v25.66,43.53 25.36,43.84 23.53,43.84 23.23,43.53 23.23,42.62 22.72,42.62 MOTOR_R+1.P$1
MOTOR_R-  (via drill 0.24 pad 0.41)
  Top 0.152: IC2.6 24.53,10.95 v25.05,10.43
  Bottom 0.152: v25.05,10.43 25.05,8.6 24.75,8.29 22.21,8.29 MOTOR_R-.P$1
MOTOR_R-1  (via drill 0.24 pad 0.41)
  Top 0.152: IC7.6 24.53,43.45 v25.05,42.92
  Bottom 0.152: v25.05,42.92 25.05,41.1 24.75,40.79 22.21,40.79 MOTOR_R-1.P$1
MOTOR_R_DIR
  Top 0.152: IC1.P$12 17.53,11.25 17.74,11.03 18.65,11.03 18.74,10.95 IC2.5
MOTOR_R_DIR1
  Top 0.152: IC5.P$12 17.53,43.75 17.74,43.53 18.65,43.53 18.74,43.45 IC7.5
MOTOR_R_PWM
  Top 0.152: IC1.P$13 17.64,11.75 18.05,11.34 18.65,11.34 18.76,11.45 IC2.4
MOTOR_R_PWM1
  Top 0.152: IC5.P$13 17.64,44.25 18.05,43.84 18.65,43.84 18.76,43.95 IC7.4
N$1
  Bottom 0.152: C2.1 18.95,19.27 18.05,20.18 14.69,20.18 13.47,21.4 13.47,21.97 IC3.3
  Bottom 0.305: Q2.P$1 20.76,19.45 C2.1
N$2
  Bottom 0.152: IC3.2 12.25,21.91 12.25,21.4 13.17,20.48 13.78,20.48 14.39,19.87 17.74,19.87 18.65,18.96 19.26,18.96 19.87,18.35 22.62,18.35 22.92,18.65 22.92,21.4 23.97,22.45 Q2.P$2 23.97,23.34 C1.1
N$3
  Bottom 0.152: C5.1 18.95,51.77 18.05,52.68 14.69,52.68 13.47,53.9 13.47,54.47 IC6.3
  Bottom 0.305: Q1.P$1 20.76,51.95 C5.1
N$4
  Bottom 0.152: IC6.2 12.25,54.41 12.25,53.9 13.17,52.98 13.78,52.98 14.39,52.37 17.74,52.37 18.65,51.46 19.26,51.46 19.87,50.85 22.62,50.85 22.92,51.15 22.92,53.9 23.97,54.95 Q1.P$2 23.97,55.84 C4.1
N$5
  Top 0.254: U1.31 41.4,51.07 41.4,51.48 39.88,53.01 38.86,53.01 37.85,51.99 37.85,47.93 38.36,47.42 39.37,47.42 39.94,47.99 U1.6
N$6  (via drill 0.24 pad 0.41)
  Top 0.254: U1.15 43.87,45.97 v44.45,45.39 | v51.56,47.42 48.61,47.42 X1.D-
  Bottom 0.254: v44.45,45.39 51.06,45.39 51.56,45.9 v51.56,47.42
N$7  (via drill 0.24 pad 0.41)
  Top 0.254: U1.14 43.37,45.45 v43.44,45.39 | v50.55,46.4 48.47,46.4 X1.D+
  Bottom 0.254: v43.44,45.39 43.44,45.9 43.94,46.4 v50.55,46.4
N$8
  Top 0.254: LED10.A 55.35,20.77 R5.1
N$9
  Top 0.254: 39.88,12.5 39.88,22.15 40.39,22.15
N$10
  Top 0.254: 42.93,22.15 48.52,22.15
N$11
  Top 0.254: 52.58,12.5 52.58,21.14
N$12
  Top 0.254: 50.55,22.15 51.56,22.15
PA0  (via drill 0.24 pad 0.41)
  Top 0.152: IC1.P$3 11.75,11.75 v11.64,11.64 | v9.81,17.43 10.43,17.43 10.73,17.13 15.3,17.13 15.91,17.74 15.91,20.48 16.16,20.73 CON1.10
  Bottom 0.152: v9.81,17.43 10.12,17.13 10.12,12.25 10.73,11.64 v11.64,11.64
PA1  (via drill 0.24 pad 0.41)
  Top 0.152: IC1.P$2 11.04,12.25 v11.03,12.25 | v12.86,18.65 12.86,17.74 13.17,17.43 15,17.43 15.61,18.05 15.61,20.79 16.05,21.23 CON1.11
  Bottom 0.152: v11.03,12.25 10.43,12.86 10.43,13.47 10.73,13.78 11.34,13.78 11.95,13.17 12.56,13.17 12.86,13.47 v12.86,18.65
PA2  (via drill 0.24 pad 0.41)
  Top 0.152: IC5.P$3 11.75,44.25 v11.64,44.14 | v9.81,49.94 10.43,49.94 10.73,49.63 15.3,49.63 15.91,50.24 15.91,52.98 16.16,53.23 CON3.10
  Bottom 0.152: v9.81,49.94 10.12,49.63 10.12,44.75 10.73,44.14 v11.64,44.14
PA3  (via drill 0.24 pad 0.41)
  Top 0.152: IC5.P$2 11.04,44.75 v11.03,44.75 | v12.86,51.15 12.86,50.24 13.17,49.94 15,49.94 15.61,50.55 15.61,53.29 16.05,53.73 CON3.11
  Bottom 0.152: v11.03,44.75 10.43,45.36 10.43,45.97 10.73,46.28 11.34,46.28 11.95,45.67 12.56,45.67 12.86,45.97 v12.86,51.15
RESET  (via drill 0.24 pad 0.41)
  Top 0.152: IC1.P$19 14.5,14.89 14.08,15.3 v13.78,15.3 13.17,15.3 12.56,14.69 12.4,14.69 R3.2 | v20.48,17.74 19.87,17.74 18.96,18.65 18.96,21.4 18.65,21.7 17.44,21.7 CON1.12 17.47,21.7
  Bottom 0.152: v13.78,15.3 14.08,15.61 14.08,18.65 14.39,18.96 18.05,18.96 18.35,18.65 18.96,18.65 19.87,17.74 v20.48,17.74
RESET1  (via drill 0.24 pad 0.41)
  Top 0.152: IC5.P$19 14.5,47.39 14.08,47.8 v13.78,47.8 13.17,47.8 12.56,47.19 12.4,47.19 R4.2 | v20.48,50.24 19.87,50.24 18.96,51.15 18.96,53.9 18.65,54.2 17.44,54.2 CON3.12 17.47,54.2
  Bottom 0.152: v13.78,47.8 14.08,48.11 14.08,51.15 14.39,51.46 18.05,51.46 18.35,51.15 18.96,51.15 19.87,50.24 v20.48,50.24
RESET2  (via drill 0.24 pad 0.41)
  Top 0.254: v44.96,14.53 46.09,14.53 JTAG.5
  Bottom 0.254: CON6.1 44.52,23.1 44.96,22.66 v44.96,14.53
RXD  (via drill 0.24 pad 0.41)
  Top 0.152: IC1.P$20 14,14.47 v13.78,14.39 | v14.69,18.35 14.69,19.75 14.48,19.96 13.41,19.96 13.18,19.73 CON1.5
  Bottom 0.152: v13.78,14.39 14.39,15 14.39,16.61 IC3.11 14.69,16.92 v14.69,18.35
RXD1  (via drill 0.24 pad 0.41)
  Top 0.152: IC5.P$20 14,46.97 v13.78,46.89 | v14.69,50.85 14.69,52.21 14.48,52.43 13.41,52.43 13.22,52.23 CON3.5
  Bottom 0.152: v13.78,46.89 14.39,47.5 14.39,49.11 IC6.11 14.69,49.42 v14.69,50.85
RXD2  (via drill 0.24 pad 0.41)
  Top 0.254: U1.2 39.91,49.99 39.37,49.45 38.86,49.45 38.36,49.96 38.36,50.98 v39.37,51.99
  Bottom 0.254: v39.37,51.99 41.4,49.96 48.01,49.96 48.52,50.47 48.52,51.48 48.05,51.95 CON5.8
RXIR  (via drill 0.24 pad 0.41)
  Top 0.152: IC4.3 19.26,27.31 19.26,25.66 18.96,25.36 16.83,25.36 16.22,24.75 v16.22,23.84
  Bottom 0.152: IC3.5 15.91,23.53 v16.22,23.84
RXIR1  (via drill 0.24 pad 0.41)
  Top 0.152: IC8.3 19.26,59.81 19.26,58.16 18.96,57.86 16.83,57.86 16.22,57.25 v16.22,56.34
  Bottom 0.152: IC6.5 15.91,56.03 v16.22,56.34
S$1
  Bottom 0.254: 2,5 2,28 4,30 25,30 28,27 28,5 25,2 5,2 2,5
S$2
  Top 0.254: 2,5 2,28 4,30 25,30 28,27 28,5 25,2 5,2 2,5
S$3
  Top 0.254: 2,38 2,60 5,63 25,63 28,60 28,37 25,34 6,34 2,38
S$4
  Bottom 0.254: 2,38 2,60 5,63 25,63 28,60 28,37 25,34 6,34 2,38
S$5
  Bottom 0.254: 33,37 33,42 37,42 37,54 33,54 33,59 36,62 46,62 46,58 53,58 53,62 56,62 59,59 59,37 56,34 49,34 49,42 39,42 39,34 36,34 33,37
S$6
  Top 0.254: 33,37 36,34 39,34 39,42 49,42 49,34 56,34 59,37 59,59 56,62 53,62 53,58 46,58 46,62 36,62 33,59 33,54 37,54 37,42 33,42 33,37
S$7
  Bottom 0.254: 33,6 33,11 37,11 37,23 33,23 33,28 36,31 46,31 46,28 53,28 53,31 56,31 59,28 59,6 56,3 49,3 49,11 39,11 39,3 36,3 33,6
S$8
  Top 0.254: 33,23 33,28 36,31 46,31 46,28 53,28 53,31 56,31 59,28 59,6 56,3 49,3 49,11 39,11 39,3 36,3 33,6 33,11 37,11 37,23 33,23
SCK  (via drill 0.24 pad 0.41)
  Top 0.254: v48.52,11.99 48.52,14.14 JTAG.7
  Bottom 0.254: CON6.5 42.89,21.1 42.42,20.63 42.42,12.5 42.93,11.99 v48.52,11.99
SCK/LED1  (via drill 0.24 pad 0.41)
  Top 0.152: CON1.8 18.18,19.73 18.35,19.57 18.35,18.96 18.05,18.65 17.43,18.65 17.13,18.35 v17.13,14.69 | T2.2 8.6,27.8 8.29,27.49 8.29,16.22 8.6,15.91 11.03,15.91 11.34,16.22 15.3,16.22 15.91,15.61 v15.91,14.69 15.5,14.28 IC1.P$17
  Bottom 0.152: v15.91,14.69 v17.13,14.69
SCK/LED2  (via drill 0.24 pad 0.41)
  Top 0.152: CON3.8 18.18,52.23 18.35,52.07 18.35,51.46 18.05,51.15 17.43,51.15 17.13,50.85 v17.13,47.19 | T1.2 8.6,60.3 8.29,59.99 8.29,48.72 8.6,48.41 11.03,48.41 11.34,48.72 15.3,48.72 15.91,48.11 v15.91,47.19 15.5,46.78 IC5.P$17
  Bottom 0.152: v15.91,47.19 v17.13,47.19
T_IR  (via drill 0.24 pad 0.41)
  Top 0.152: S1.2 19.77,6.97 v19.87,7.07 | 18.35,26.27 18.24,26.16 R2.2 18.54,26.37 IC4.4 18.65,27.65 18.65,28.71 18.96,29.02 22.62,29.02 22.92,28.71 v22.92,27.8
  Bottom 0.152: v19.87,7.07 21.09,8.29 21.09,13.47 21.7,14.08 21.7,17.74 22.01,18.05 24.14,18.05 24.75,18.65 24.75,24.45 24.14,25.05 23.23,25.05 22.92,25.36 v22.92,27.8
T_IR1  (via drill 0.24 pad 0.41)
  Top 0.152: S2.2 19.77,39.47 v19.87,39.57 | 18.35,58.77 18.24,58.66 R1.2 18.54,58.87 IC8.4 18.65,60.15 18.65,61.21 18.96,61.52 22.62,61.52 22.92,61.21 v22.92,60.3
  Bottom 0.152: v19.87,39.57 21.09,40.79 21.09,45.97 21.7,46.58 21.7,50.24 22.01,50.55 24.14,50.55 24.75,51.15 24.75,56.95 24.14,57.55 23.23,57.55 22.92,57.86 v22.92,60.3
TXD  (via drill 0.24 pad 0.41)
  Top 0.152: IC1.P$1 11.46,12.75 v11.03,13.17 | CON1.6 13.2,19.23 v13.78,19.26
  Bottom 0.152: v11.03,13.17 11.64,12.56 12.56,12.56 13.17,13.17 13.17,16.66 IC3.12 13.47,17.07 13.47,18.96 v13.78,19.26
TXD1  (via drill 0.24 pad 0.41)
  Top 0.152: IC5.P$1 11.46,45.25 v11.03,45.67 | CON3.6 13.2,51.73 v13.78,51.76
  Bottom 0.152: v11.03,45.67 11.64,45.06 12.56,45.06 13.17,45.67 13.17,49.16 IC6.12 13.47,49.57 13.47,51.46 v13.78,51.76
TXD2  (via drill 0.24 pad 0.41)
  Top 0.254: U1.30 41.87,51.95 v41.91,51.99
  Bottom 0.254: v41.91,51.99 41.91,50.98 42.42,50.47 46.99,50.47 47.5,50.98 47.5,51.37 CON5.7
TXIR  (via drill 0.24 pad 0.41)
  Top 0.152: v17.43,24.75 17.74,25.05 19.26,25.05 19.87,25.66 19.87,26.27 20.18,26.58 20.18,27.27 IC4.2
  Bottom 0.152: IC3.6 17.18,24.5 v17.43,24.75
TXIR1  (via drill 0.24 pad 0.41)
  Top 0.152: v17.43,57.25 17.74,57.55 19.26,57.55 19.87,58.16 19.87,58.77 20.18,59.08 20.18,59.77 IC8.2
  Bottom 0.152: IC6.6 17.18,57 v17.43,57.25
VBAT  (via drill 0.24 pad 0.41)
  Top 0.152: D1.6 7.64,17.17 7.68,17.13 6.77,17.13 6.77,15.91 6.73,15.87 D1.3 3.07,15.87 2.81,15.61 2.81,13.78 3.41,13.17 5.24,13.17 5.55,12.86 5.55,9.51 5.55,9.21 5.55,7.99 7.38,6.16 7.38,3.41 7.68,3.11 12.25,3.11 v12.56,3.41 | v12.56,4.94 15.3,4.94 15.91,4.33 17.72,4.33 S1.1
  Bottom 0.152: v12.56,3.41 v12.56,4.94
VBAT1  (via drill 0.24 pad 0.41)
  Top 0.152: D3.6 7.64,49.67 7.68,49.63 6.77,49.63 6.77,48.41 6.73,48.37 D3.3 3.07,48.37 2.81,48.11 2.81,46.28 3.41,45.67 5.24,45.67 5.55,45.36 5.55,42.01 5.55,41.71 5.55,40.49 7.38,38.66 7.38,35.91 7.68,35.61 12.25,35.61 v12.56,35.91 | v12.56,37.44 15.3,37.44 15.91,36.83 17.72,36.83 S2.1
  Bottom 0.152: v12.56,35.91 v12.56,37.44
VCC  (via drill 0.24 pad 0.41)  (1 unrouted)
  Top 0.152: 21.4,3.72 22.01,3.72 22.35,4.06 T3.6 22.92,5.32 22.92,6.16 23.84,7.07 24.75,7.07 25.36,7.68 25.97,7.68 26.58,8.29 26.58,11.64 26.27,11.95 25.66,11.95 25.36,11.64 24.75,11.64 24.45,11.95 IC2.8 | 21.4,3.72 21.09,4.02 21.09,4.71 T3.4 | T2.4 11.18,27.19 10.73,27.19 10.43,27.49 10.43,28.1 10.77,28.45 T2.6 11.49,28.71 v12.25,28.71 14.08,28.71 14.39,28.41 17.43,28.41 17.59,28.25 IC4.5 | v12.25,27.19 11.27,27.19 T2.4 | IC4.1 21.44,27.54 v22.31,28.41 | 9.21,4.33 15,4.33 16.22,3.11 20.79,3.11 21.4,3.72 | R3.1 11.03,14.83 11.03,15.3 11.64,15.91 14.39,15.91 15,15.3 | CON1.1 11.91,21.7 11.03,21.7 10.73,22.01 v10.73,23.53 11.03,23.84 11.03,26.96 T2.4 | 15,15.3 IC1.P$18 | 15,15.3 v15.3,15.3 | 6.16,9.21 C3.1 6.16,9.52 v6.16,13.17
  Top 0.305: v12.25,13.78 11.34,13.78 10.99,14.12 R3.1 10.89,14.69 9.21,14.69 8.29,13.78 7.68,13.78 7.07,13.17 v6.16,13.17 | S1.3 7.48,6.97 6.16,8.29 6.16,9.21
  Top 1.016: S1.4 S1.3
  Bottom 0.152: IC3.9 IC3.10 15.91,15.91 v15.3,15.3 | IC3.4 14.64,20.84 14.69,20.79 | IC3.7 18.35,21.97 18.35,20.79 18.05,20.48 15,20.48 14.69,20.79 | v22.31,28.41 14.39,28.41 14.08,28.71 v12.25,28.71 | IC3.13 11.95,17.02 | 10.73,21.7 10.83,21.8 IC3.1 11.03,21.86 | 12.25,16.22 11.95,16.22 11.95,19.57 11.03,20.48 11.03,21.86 | 11.03,21.86 11.03,23.23 v10.73,23.53 14.39,23.53 14.69,23.23 14.69,20.79 | 8.24,24.03 9.09,24.03 9.81,24.75 11.64,24.75 12.25,25.36 v12.25,27.19
  Bottom 0.305: 11.95,16.71 IC3.13 12.25,16.71 12.25,16.22 v12.25,13.78
VCC1  (via drill 0.24 pad 0.41)  (1 unrouted)
  Top 0.152: 21.4,36.22 22.01,36.22 22.35,36.56 T4.6 22.92,37.82 22.92,38.66 23.84,39.57 24.75,39.57 25.36,40.18 25.97,40.18 26.58,40.79 26.58,44.14 26.27,44.45 25.66,44.45 25.36,44.14 24.75,44.14 24.45,44.45 IC7.8 | 21.4,36.22 21.09,36.52 21.09,37.21 T4.4 | T1.4 11.18,59.69 10.73,59.69 10.43,59.99 10.43,60.6 10.77,60.95 T1.6 11.49,61.21 v12.25,61.21 14.08,61.21 14.39,60.91 17.43,60.91 17.59,60.75 IC8.5 | v12.25,59.69 11.27,59.69 T1.4 | IC8.1 21.44,60.04 v22.31,60.91 | 9.21,36.83 15,36.83 16.22,35.61 20.79,35.61 21.4,36.22 | R4.1 11.03,47.33 11.03,47.8 11.64,48.41 14.39,48.41 15,47.8 | CON3.1 11.91,54.2 11.03,54.2 10.73,54.51 v10.73,56.03 11.03,56.34 11.03,59.46 T1.4 | 15,47.8 IC5.P$18 | 15,47.8 v15.3,47.8 | C6.1 6.16,41.71 v6.16,45.67
  Top 0.305: v12.25,46.28 11.34,46.28 10.99,46.62 R4.1 10.89,47.19 9.21,47.19 8.29,46.28 7.68,46.28 7.07,45.67 v6.16,45.67 | S2.3 7.48,39.47 6.16,40.79 6.16,41.71
  Top 1.016: S2.4 S2.3
  Bottom 0.152: IC6.9 IC6.10 15.91,48.41 v15.3,47.8 | IC6.4 14.64,53.34 14.69,53.29 | IC6.7 18.35,54.47 18.35,53.29 18.05,52.98 15,52.98 14.69,53.29 | v22.31,60.91 14.39,60.91 14.08,61.21 v12.25,61.21 | IC6.13 11.95,49.52 | 10.73,54.2 10.83,54.3 IC6.1 11.03,54.36 | 12.25,48.72 11.95,48.72 11.95,52.07 11.03,52.98 11.03,54.36 | 11.03,54.36 11.03,55.73 v10.73,56.03 14.39,56.03 14.69,55.73 14.69,53.29 | 8.24,56.53 9.09,56.53 9.81,57.25 11.64,57.25 12.25,57.86 v12.25,59.69
  Bottom 0.305: 11.95,49.22 IC6.13 12.25,49.22 12.25,48.72 v12.25,46.28
VCC2  (via drill 0.24 pad 0.41)
  Top 0.254: U1.18 U1.19 v45.98,47.99 46.04,47.99 46.48,48.44 46.48,49.45 46.99,49.96 48.28,49.96 X1.VUSB | U1.1 39.4,50.49 v39.37,50.47
  Bottom 0.254: v39.37,50.47 39.88,50.47 42.42,47.93 45.91,47.93 v45.98,47.99
VCC3  (via drill 0.24 pad 0.41)
  Top 0.254: R5.2 52.81,24.04 R6.2 48.01,24.22 v47.5,24.22 42.46,24.22 41.18,22.94 JTAG.2
  Bottom 0.254: CON6.12 47.42,24.14 v47.5,24.22
(copper drawn outside any net)
  shapes: Bottom area x2, Bottom circle x4, Top area x2, Top circle x4

## Text on the board
Top: NorthernStars | mrShark | debug | adapter | mrShark | v0.1 | NorthernStars | NorthernStars | mrShark | programming | adapter | mrShark | v0.1 | NorthernStars | <